# EAGLE board Domuino_ (EAGLE 6.6.0)
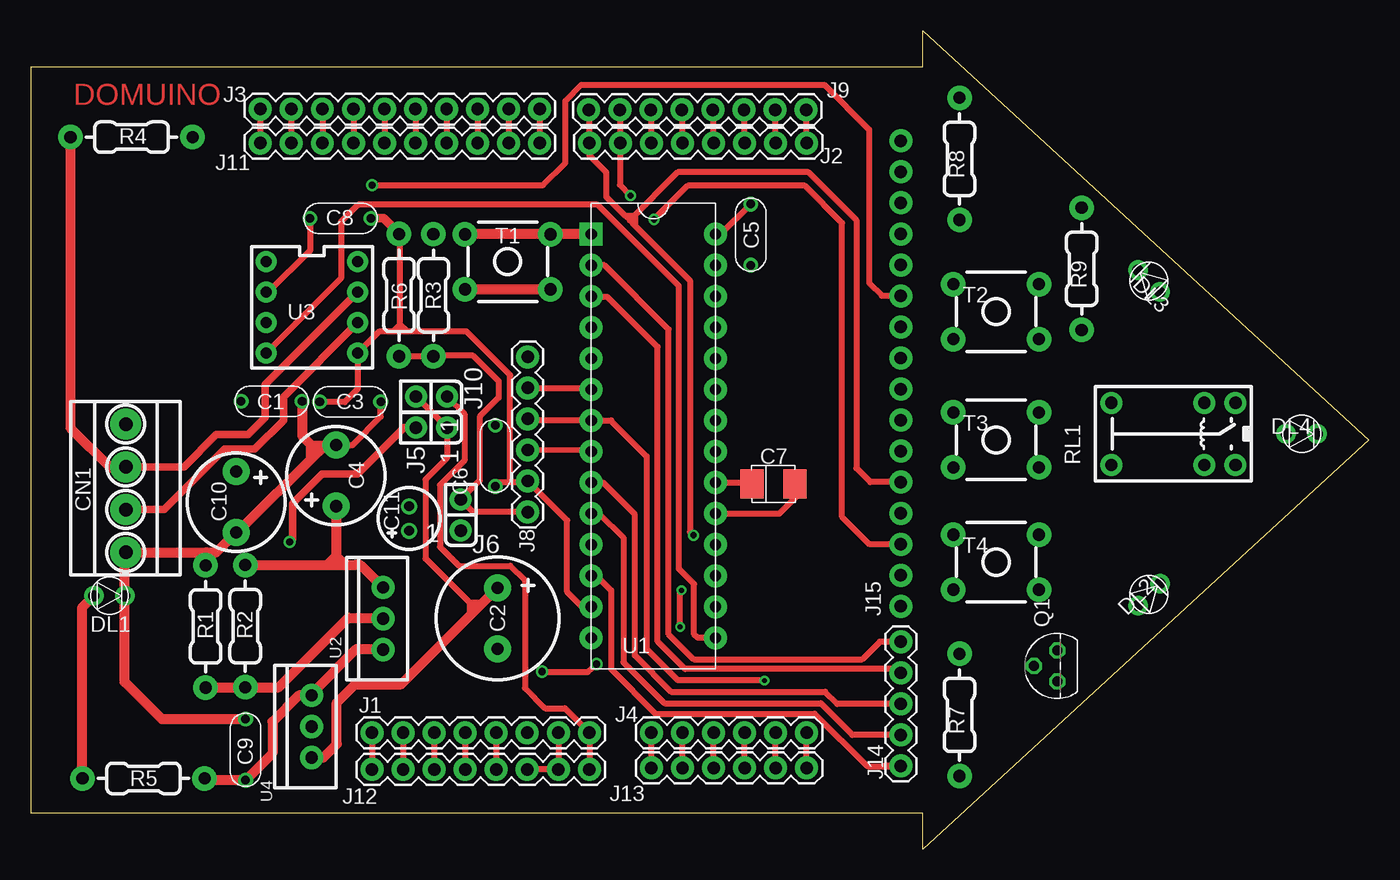
[diagram p0: board, top side]
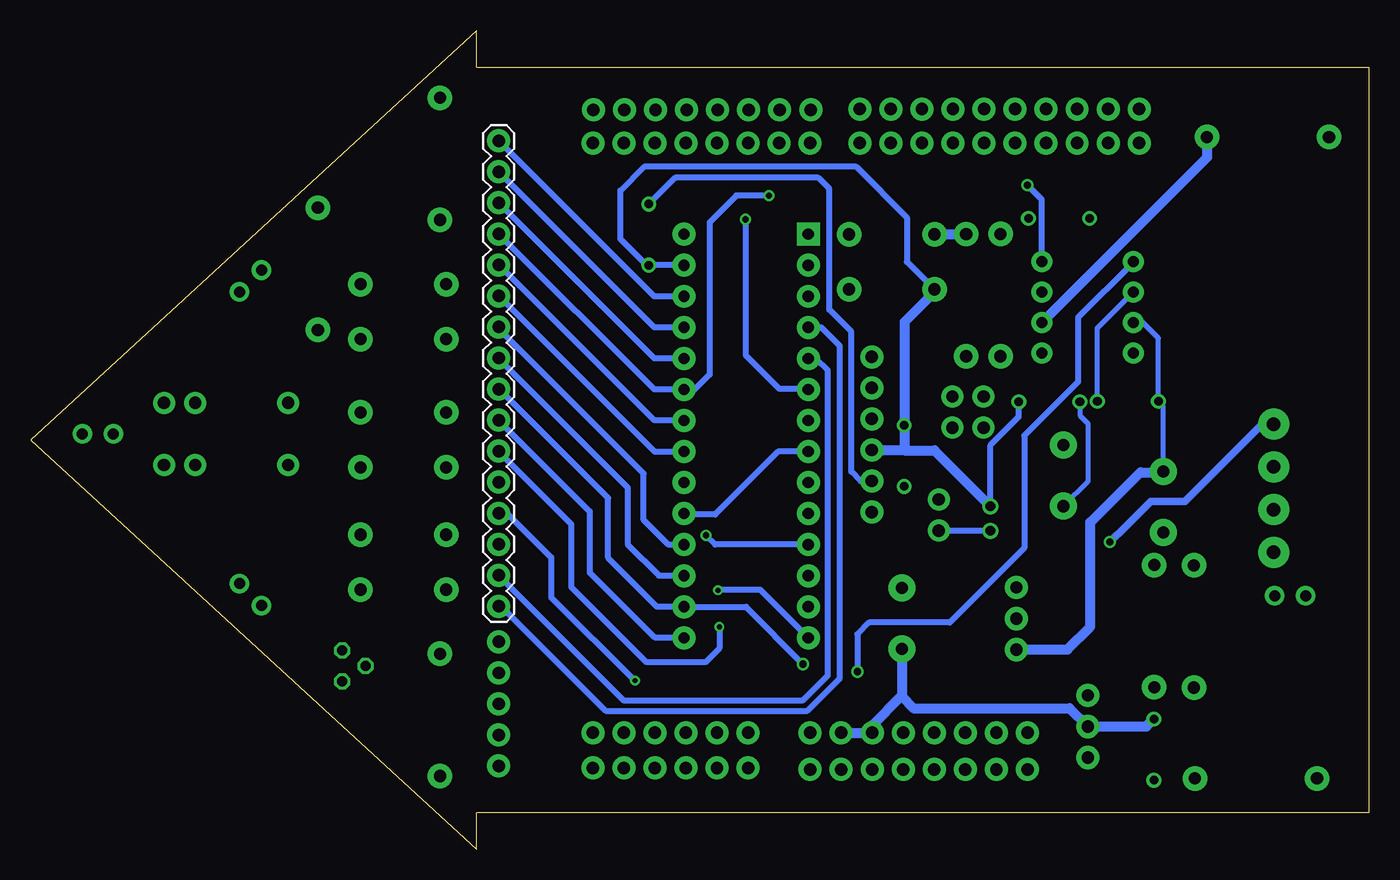
[diagram p1: board, bottom side, seen from below]

Size 109.5 x 67 mm. Coordinates in mm from the lower left corner, seen from the top.
Outline: 0,3 73,3 73,0 109.5,33.5 73,67 73,64 0,64 0,3
Copper layers (1*16): Top 0.035mm / dielectric 1.5mm / Bottom 0.035mm
Design rules "default *": minimum track width 10mil, minimum drill 24mil, track to track 8mil, track to pad 8mil, pad to pad 8mil, via to via 8mil, smd to smd 8mil, copper to edge 40mil, drill to drill 8mil, minimum pad ring 10mil, minimum via ring 8mil, stop-mask expansion 4mil, vias tented up to drill 0.6mm, thermal gap 10mil

## Footprints (pad centres in the part's own frame; a part is rotated, then mirrored left to right if it is on the bottom)
C_P5 = drill 0.7: P$1 -2.5,0; P$2 2.5,0
E_P5_D10 = drill 1 pad 2.2: P$1 -2.5,0; P$2 2.5,0
E_P5_D8 = drill 1 pad 2.2: P$1 -2.5,0; P$2 2.5,0
SIZEB = smd 1.9 x 2.4: P$2 1.75,0; P$3 -1.75,0
E_P2_D5 = drill 0.8 pad 1.3: P$1 -1,0; P$2 1,0
MORS_4V_P3.5 = drill 1.1 pad 2.54: P$1 0,5.25; P$2 0,1.75; P$3 0,-1.75; P$4 0,-5.25
DIODO_3MM_TRAD. = drill 0.9 pad 1.6: P$1 1.27,0; P$2 -1.27,0
1X08_ROUND = drill 1.016 pad 1.88: 1 -8.89,0; 2 -6.35,0; 3 -3.81,0; 4 -1.27,0; 5 1.27,0; 6 3.81,0; 7 6.35,0; 8 8.89,0
1X10 = drill 1.016 pad 1.88: 1 -11.43,0; 2 -8.89,0; 3 -6.35,0; 4 -3.81,0; 5 -1.27,0; 6 1.27,0; 7 3.81,0; 8 6.35,0; 9 8.89,0; 10 11.43,0
1X06 = drill 1.016 pad 1.88: 1 -6.35,0; 2 -3.81,0; 3 -1.27,0; 4 1.27,0; 5 3.81,0; 6 6.35,0
JUMPER(2V) = drill 1 pad 1.8: P$1 0,1.27; P$2 0,-1.27
1X05 = drill 1.016 pad 1.88: 1 -5.08,0; 2 -2.54,0; 3 0,0; 4 2.54,0; 5 5.08,0
1X16 = drill 1.016 pad 1.88: 1 -17.78,0; 2 -15.24,0; 3 -12.7,0; 4 -10.16,0; 5 -7.62,0; 6 -5.08,0; 7 -2.54,0; 8 0,0; 9 2.54,0; 10 5.08,0; 11 7.62,0; 12 10.16,0; 13 12.7,0; 14 15.24,0; 15 17.78,0; 16 20.32,0
TO92 = drill 0.813 octagon: 1 1.27,0; 2 0,1.905; 3 -1.27,0
R_TRAD_P10 = drill 1 pad 2: P$1 -5,0; P$2 5,0
SY-()-K = drill 1 pad 1.8: CO1 2.54,5.08; CO2 -2.54,5.08; NA -2.54,-5.08; NC 2.54,-5.08; P$1 -2.54,-2.54; P$2 2.54,-2.54
EVQ_PAG_07M = drill 1 pad 2: P$1 3.5,-2.25; P$2 3.5,2.25; P$3 -3.5,2.25; P$4 -3.5,-2.25
SPDIP-28PIN = drill 0.914 pad 1.88 square: P$1 -5.08,17.78 | drill 0.914 pad 1.88: P$2 -5.08,15.24; P$3 -5.08,12.7; P$4 -5.08,10.16; P$5 -5.08,7.62; P$6 -5.08,5.08; P$7 -5.08,2.54; P$8 -5.08,0; P$9 -5.08,-2.54; P$10 -5.08,-5.08; P$11 -5.08,-7.62; P$12 -5.08,-10.16; P$13 -5.08,-12.7; P$14 -5.08,-15.24; P$15 5.08,-15.24; P$16 5.08,-12.7; P$17 5.08,-10.16; P$18 5.08,-7.62; P$19 5.08,-5.08; P$20 5.08,-2.54; P$21 5.08,0; P$22 5.08,2.54; P$23 5.08,5.08; P$24 5.08,7.62; P$25 5.08,10.16; P$26 5.08,12.7; P$27 5.08,15.24; P$28 5.08,17.78
TO220 = drill 1 pad 1.9: P$1 -2.54,0; P$2 0,0; P$3 2.54,0
DIL08_P7.5 = drill 0.9 pad 1.7: P$1 -3.75,3.75; P$2 -3.75,1.25; P$3 -3.75,-1.25; P$4 -3.75,-3.75; P$5 3.75,-3.75; P$6 3.75,-1.25; P$7 3.75,1.25; P$8 3.75,3.75

## Placement (x,y rotation side)
C1  100n 50V  [C_P5]  19.72,36.66 0 top
C2  C_EL_P5X10  [E_P5_D10]  38.21,18.89 270 top
C3  C_TRAD_P5  [C_P5]  26.15,36.61 0 top
C4  C_EL_P5X8  [E_P5_D8]  24.99,30.58 90 top
C5  C_TRAD_P5  [C_P5]  58.92,50.3 270 top
C6  C_TRAD_P5  [C_P5]  38.02,32.2 90 top
C7  COND.TANTALIO_SIZE_B  [SIZEB]  60.78,29.9 180 top
C8  100n 50V  [C_P5]  25.36,51.63 180 top
C9  C_TRAD_P5  [C_P5]  17.59,8.15 90 top
C10  C_EL_P5X8  [E_P5_D8]  16.82,28.42 270 top
C11  C_EL_P2_D5  [E_P2_D5]  30.97,27.07 90 top
CN1  MORS_4VIE_P.3.5  [MORS_4V_P3.5]  7.8,29.55 0 top
DL1  LED_3MM_TRAD.  [DIODO_3MM_TRAD.]  6.45,20.75 0 top
DL2  LED_3MM_TRAD.  [DIODO_3MM_TRAD.]  91.5,20.85 45 top
DL3  LED_3MM_TRAD.  [DIODO_3MM_TRAD.]  91.5,46.5 135 top
DL4  LED_3MM_TRAD.  [DIODO_3MM_TRAD.]  104,34 0 top
J1  POWER - IN  [1X08_ROUND]  36.83,9.54 0 top
J2  DIGITAL_L - IN  [1X08_ROUND]  54.61,57.8 0 top
J3  DIGITAL_H - OUT  [1X10]  30.23,60.57 0 top
J4  ANALOG - IN  [1X06]  57.15,9.54 0 top
J5  JUMPER_2VIE_TRAD  [JUMPER(2V)]  32.8,34.5 270 top
J6  JUMPER_2VIE_TRAD  [JUMPER(2V)]  35.2,27.35 180 top
J8  PGM  [1X06]  40.68,33.95 90 top
J9  DIGITAL_L - OUT  [1X08_ROUND]  54.56,60.52 0 top
J10  JUMPER_2VIE_TRAD  [JUMPER(2V)]  32.8,37.05 270 top
J11  DIGITAL_H - IN  [1X10]  30.23,57.8 0 top
J12  POWER - OUT  [1X08_ROUND]  36.83,6.54 0 top
J13  ANALOG - OUT  [1X06]  57.15,6.66 0 top
J14  GPIO1  [1X05]  71.2,11.9 270 top
J15  GPIO2  [1X16]  71.2,37.66 90 bottom
Q1  BC337-25  [TO92]  84,15 90 top
R1  R_TRAD_P10  [R_TRAD_P10]  14.32,18.24 270 top
R2  R_TRAD_P10  [R_TRAD_P10]  17.56,18.26 90 top
R3  R_TRAD_P10  [R_TRAD_P10]  32.96,45.34 270 top
R4  R_TRAD_P10  [R_TRAD_P10]  8.26,58.28 0 top
R5  R_TRAD_P10  [R_TRAD_P10]  9.24,5.8 180 top
R6  R_TRAD_P10  [R_TRAD_P10]  30.15,45.35 90 top
R7  R_TRAD_P10  [R_TRAD_P10]  76,11 90 top
R8  R_TRAD_P10  [R_TRAD_P10]  76,56.5 90 top
R9  R_TRAD_P10  [R_TRAD_P10]  86,47.5 90 top
RL1  RELE'_1S_2C_SY-()K  [SY-()-K]  93.5,34 90 top
T1  PULSANTE_EVQ_PAG_07M  [EVQ_PAG_07M]  39.04,48.08 0 top
T2  PULSANTE_EVQ_PAG_07M  [EVQ_PAG_07M]  79,44 0 top
T3  PULSANTE_EVQ_PAG_07M  [EVQ_PAG_07M]  79,33.5 0 top
T4  PULSANTE_EVQ_PAG_07M  [EVQ_PAG_07M]  79,23.5 0 top
U1  [SPDIP-28PIN]  50.95,32.55 0 top
U2  LM317T_TO220  [TO220]  28.84,18.88 90 top
U3  MCP2562_DIL08  [DIL08_P7.5]  23.02,44.35 0 top
U4  [TO220]  22.99,10.05 90 top

## Library data of the parts
C1-C11 CN1 DL1-DL4 J5 J6 J10 R1-R9 RL1 T1-T4 U2-U4 = SEAV
J1 J12 = SparkFun-Connectors; PROD_ID: POWER
J2 J4 J8 J9 J13 = SparkFun-Connectors; PROD_ID: CONN-08437
J3 J11 = SparkFun-Connectors; PROD_ID: CONN-11563
J14 J15 = SparkFun-Connectors
Q1 = transistor-npn
U1 = Luca

## Nets
+3V3: C3.P$1 C4.P$1 C5.P$1 C6.P$1 C8.P$1 J8.2 R2.P$2 R6.P$2 U1.P$13 U1.P$28 U2.P$3 U3.P$5
+5V: C1.P$1 C9.P$1 C10.P$1 R5.P$1 U2.P$1 U3.P$3 U4.P$3
+12V: C2.P$1 J5.P$1 J10.P$2 U4.P$1
GND: C1.P$2 C2.P$2 C3.P$2 C4.P$2 C5.P$2 C6.P$2 C7.P$3 C8.P$2 C9.P$2 C10.P$2 C11.P$2 CN1.P$4 DL1.P$1 J1.6 J1.7 J8.3 J12.6 J12.7 R1.P$1 T1.P$1 T1.P$4 U1.P$8 U1.P$19 U1.P$27 U3.P$2 U4.P$2
N$1: J1.8 J10.P$1 J12.8
N$2: R1.P$2 R2.P$1 U2.P$2
N$3: J4.4 J13.4
N$4: C11.P$1 J6.P$1
N$5: J4.5 J13.5
N$6: J4.6 J13.6
N$7: R3.P$1 T1.P$2 T1.P$3 U1.P$1
N$8: J8.5 J15.3 U1.P$6
N$9: J8.4 J15.4 U1.P$7
N$10: CN1.P$2 R4.P$1 U3.P$7
N$11: CN1.P$3 R4.P$2 U3.P$6
N$12: J15.8 U1.P$16 U3.P$1
N$13: J15.7 U1.P$15 U3.P$4
N$14: J3.1 J11.1
N$15: J15.11 U1.P$21 U3.P$8
N$16: J6.P$2 J8.1 R3.P$2 R6.P$1
N$17: J3.2 J11.2
N$18: J3.3 J11.3
N$19: J3.4 J11.4
N$20: J3.5 J11.5
N$21: J3.6 J11.6
N$22: J3.7 J11.7
N$23: J3.8 J11.8
N$24: J3.9 J11.9
N$25: J3.10 J11.10
N$26: J2.1 J9.1 J15.5 U1.P$11
N$27: C7.P$2 U1.P$20
N$28: J15.14 U1.P$24
N$29: J2.3 J9.3
N$30: J2.4 J9.4
N$31: J2.5 J9.5
N$32: J2.6 J9.6
N$33: J2.7 J9.7
N$34: J2.8 J9.8
N$35: J1.1 J12.1
N$36: J1.2 J12.2
N$37: J1.3 J12.3
N$38: J1.4 J12.4
N$39: J1.5 J12.5
N$40: J4.1 J13.1
N$41: J4.2 J13.2
N$42: J4.3 J13.3
N$43: J14.5 U1.P$12
N$44: J14.4 U1.P$10
N$45: J14.3 U1.P$9
N$46: J14.2 U1.P$3
N$47: J14.1 U1.P$2
N$48: J15.1 U1.P$4
N$49: J15.2 U1.P$5
N$50: J15.6 U1.P$14
N$51: J15.12 U1.P$22
N$52: J15.9 U1.P$17
N$53: J15.10 U1.P$18
N$54: J2.2 J9.2 J15.13 U1.P$23
N$55: J15.15 U1.P$25
N$56: J15.16 U1.P$26
N$58: DL1.P$2 R5.P$2
V+: CN1.P$1 J5.P$2

## Tracks (layer width: path | path; a pad name or v marks a point on that pad's centre or on a via)
+3V3
  Top 0.4: 43.9,21.05 43.9,23.1
  Top 0.5: U1.P$28 56.45,50.33 C5.P$1 | U3.P$5 26.77,37.67 25.7,36.6 23.66,36.6 C3.P$1 | U1.P$13 45.1,19.85 43.9,21.05 43.9,26.92 J8.2 40.59,30.05 39.1,30.05 | U3.P$5 26.77,40.62 | 30.25,42.95 30.25,42.45 30.3,42.4 | 30.25,42.95 30.25,50.25 R6.P$2 | 30.3,42.4 28.57,42.4 U3.P$5 | 30.3,42.4 35.65,42.4 39.25,38.8 39.25,30.1 39.15,30.1 39.1,30.05 | C6.P$1 38.02,29.72 38.35,30.05 39.1,30.05 | 30.25,42.95 30.75,42.45 | 29.75,42.45 30.25,42.95
  Top 0.7: C8.P$1 28.87,51.63 R6.P$2
  Top 0.8: R2.P$2 25.05,23.26 | 25.05,23.26 26.51,23.26 | U2.P$3 27,23.26 26.51,23.26 | C4.P$1 24.99,23.32 25.05,23.26 | 26.51,23.26 26.5,23.25
  Bottom 0.4: C3.P$1 23.65,35.5 23,34.85 23,30.08 C4.P$1
  Bottom 0.5: J8.2 41.59,30.14 42.35,30.9 42.35,42.35 44.15,44.15 44.15,54.05 45.05,54.95 56.77,54.95 C5.P$1
+5V
  Top 0.8: R5.P$1 14.39,5.65 C9.P$1 19.8,7.86 19.8,10.45 21.94,12.59 U4.P$3 22.99,12.74 26.65,16.4 28.78,16.4 U2.P$1
  Bottom 0.4: C10.P$1 16.82,36.26 C1.P$1 17.22,41.82 18.5,43.1 U3.P$3
  Bottom 0.8: U2.P$1 24.66,16.34 22.8,18.2 22.8,26.75 18.7,30.85 16.89,30.85 C10.P$1
+12V
  Top 0.5: 35.9,20.2 32.3,23.8 32.3,30.25 34.07,32.02 J5.P$1 J10.P$2 | 35.9,20.2 36,20.1 | 36,20.1 36.46,19.64 | 35.9,20.2 35.9,19.3 | 36.85,20.2 35.95,20.2 36,20.15 36,20.1
  Top 0.8: U4.P$1 23.96,7.51 25.05,8.6 25.05,12 26.55,13.5 30.32,13.5 36.46,19.64 C2.P$1
GND
  Top 0.5: J8.3 45.69,32.73 U1.P$8 | U1.P$19 61.27,27.47 62.6,28.8 62.6,29.83 C7.P$3 | U3.P$2 19.45,45.6 22.9,49.05 22.9,51.59 C8.P$2 | C4.P$2 26.33,33.08 28.65,35.4 C3.P$2 | J1.7 J12.7 J12.6
  Top 0.8: 14.4,24.3 CN1.P$4 7.72,24.22 DL1.P$1 7.7,20.73 7.7,13.7 10.75,10.65 C9.P$2 | 14.4,24.3 15.2,24.3 C10.P$2 16.92,25.92 23.52,32.52 | R1.P$1 14.32,24.22 14.4,24.3 | 23.52,32.52 24.15,33.15 24.93,33.15 C4.P$2 | C1.P$2 22.22,33.83 23.52,32.52 | T1.P$4 T1.P$1
  Bottom 0.4: C1.P$2 22.22,42.65 U3.P$2
  Bottom 0.5: U1.P$8 48.35,32.55 53.5,27.4 55.96,27.4 U1.P$19 | C5.P$2 U1.P$27 59.09,47.79 61.25,49.95 61.25,53.9 59.3,55.85 41.95,55.85 37.8,51.7 37.8,48.09 T1.P$4 | 30.97,28.08 30.97,33.08 28.65,35.4 C3.P$2
  Bottom 0.8: C9.P$2 18.19,10.05 U4.P$2 24.49,11.55 37.25,11.55 38.21,12.51 C2.P$2 38.21,12.61 38.2,12.6 40.64,10.16 J1.6 J1.7 | T1.P$4 35.54,45.61 38,43.15 38,34.72 C6.P$2 38.02,32.67 | 38.02,32.67 38,32.65 35.55,32.65 C11.P$2 30.97,28.08 | J8.3 38.03,32.68 38.02,32.67
N$1
  Top 0.5: J10.P$1 34.07,37.03 35.5,35.6 35.5,31.8 33.5,29.8 33.5,24.75 35.05,23.2 39.25,23.2 40.45,22 40.45,13.2 42.1,11.55 43.71,11.55 J1.8 J12.8
N$2
  Top 0.8: R1.P$2 17.54,13.24 R2.P$1 20.31,13.26 26,18.95 28.77,18.95 U2.P$2
N$3
  Top 0.5: J13.4 J4.4
N$4
  Bottom 0.5: J6.P$1 C11.P$1
N$5
  Top 0.5: J13.5 J4.5
N$6
  Top 0.5: J13.6 J4.6
N$7
  Top 0.8: U1.P$1 T1.P$2 T1.P$3
  Bottom 0.8: T1.P$3 33.27,50.33 R3.P$1
N$8  (via drill 0.5)
  Top 0.5: J8.5 45.74,37.76 U1.P$6 | J15.3 68.64,24.96 66.4,27.2 66.4,51.25 63.35,54.3 53.75,54.3 v51,51.55
  Bottom 0.5: v51,51.55 51,40.45 48.25,37.7 45.94,37.7 U1.P$6
N$9  (via drill 0.4)
  Top 0.5: J8.4 40.81,35.09 U1.P$7 47.51,35.09 47.51,35.04 50.4,32.15 50.4,16.4 52.95,13.85 60,13.85 v60.05,13.8
  Bottom 0.5: v60.05,13.8 66.9,20.6 66.9,23.9 70.5,27.5 J15.4
N$10
  Top 0.6: CN1.P$2 12.55,31.3 15.2,33.95 17.8,33.95 19.2,35.35 19.2,38.03 U3.P$7
  Top 0.8: R4.P$1 3.26,34.49 6.5,31.25 7.75,31.25 CN1.P$2
N$11
  Top 0.6: CN1.P$3 10.95,27.8 15.9,32.75 18.35,32.75 20.7,35.1 20.7,37.03 U3.P$6
  Bottom 0.8: R4.P$2 13.26,56.61 U3.P$6
N$12  (via drill 0.6)
  Top 0.5: v46.3,15.15 45.6,14.5 42,14.5 41.95,14.55 v41.85,14.55
  Bottom 0.5: U3.P$1 19.27,48.03 23.8,43.5 23.8,38.25 28.2,33.85 28.2,24.65 34.3,18.55 40.9,18.55 41.85,17.6 v41.85,14.55 | v46.3,15.15 50.95,19.85 U1.P$16 58.25,19.85 62.25,23.85 62.25,28.75 71.16,37.66 J15.8
N$13
  Top 0.5: U1.P$15 54.59,17.31 54.3,17.6 54.3,21.7 53.05,22.95 53.05,46.1 46.4,52.75 26.8,52.75 25.4,51.35 25.4,46.73 U3.P$4
  Bottom 0.5: U1.P$15 arc-90 56.07,17.35 58.45,17.35 63.75,22.65 63.75,27.65 71.2,35.1 J15.7 70.82,35.12
N$14
  Top 0.5: J3.1 J11.1
N$15  (via drill 0.6)
  Top 0.5: v27.95,54.35 41.95,54.35 43.75,56.15 43.75,61.25 45.05,62.55 64.95,62.55 68.6,58.9 68.6,46.35 69.65,45.3 71.18,45.3 J15.11
  Bottom 0.5: 70.6,45.3 71.18,45.3 J15.11 71.18,45.28 58.45,32.55 U1.P$21 | U3.P$8 26.77,53.17 v27.95,54.35
N$16
  Top 0.5: R6.P$1 32.75,40.35 | 32.75,40.35 33.25,40.35 R3.P$2 | J8.1 36.22,27.6 J6.P$2 36.75,30.17 36.75,35.4 38.3,36.95 38.3,38.3 36.2,40.4 32.8,40.4 32.75,40.35
N$17
  Top 0.5: J3.2 J11.2
N$18
  Top 0.5: J3.3 J11.3
N$19
  Top 0.5: J3.4 J11.4
N$20
  Top 0.5: J3.5 J11.5
N$21
  Top 0.5: J3.6 J11.6
N$22
  Top 0.5: J3.7 J11.7
N$23
  Top 0.5: J3.8 J11.8
N$24
  Top 0.5: J3.9 J11.9
N$25
  Top 0.5: J3.10 J11.10
N$26  (via drill 0.5)
  Top 0.5: J9.1 45.7,60.49 45.7,57.25 | 45.7,57.25 45.7,56.8 47.1,55.4 47.1,53.4 48.65,51.85 | J2.1 45.72,57.27 45.7,57.25 | J15.5 68.71,30.04 67.55,31.2 67.55,51.5 63.65,55.4 52.95,55.4 49.02,51.48 | 48.65,51.85 49.02,51.48 | 49.02,51.48 49.45,51.05 | 49.45,51.05 53.95,46.55 53.95,26 v54.25,25.7 | 49.45,51.05 49.45,51.85 48.65,51.85
  Bottom 0.5: U1.P$11 53.48,24.93 v54.25,25.7
N$27
  Top 0.5: U1.P$20 58.92,30.01 C7.P$2
N$28
  Bottom 0.5: U1.P$24 58.47,40.17 J15.14
N$29
  Top 0.5: J9.3 50.75,57.85 J2.3
N$30
  Top 0.5: J9.4 53.29,57.85 J2.4
N$31
  Top 0.5: J9.5 55.83,57.85 J2.5
N$32
  Top 0.5: J9.6 58.37,57.85 J2.6
N$33
  Top 0.5: J9.7 60.91,57.85 J2.7
N$34
  Top 0.5: J9.8 63.45,57.85 J2.8
N$35
  Top 0.5: J1.1 J12.1
N$36
  Top 0.5: J1.2 J12.2
N$37
  Top 0.5: J1.3 J12.3
N$38
  Top 0.5: J1.4 J12.4
N$39
  Top 0.5: J1.5 J12.5
N$40
  Top 0.5: J13.1 J4.1
N$41
  Top 0.5: J13.2 J4.2
N$42
  Top 0.5: J13.3 J4.3
N$43
  Top 0.5: 69.83,6.82 J14.5 71.18,6.8 68.45,6.8 64.15,11.1 51.15,11.1 47.5,14.75 47.5,21.2 46.31,22.39 U1.P$12
N$44
  Top 0.5: J14.4 67.24,9.36 64.65,11.95 51.85,11.95 48.5,15.3 48.5,25.5 46.6,27.4 45.94,27.4 U1.P$10
N$45
  Top 0.5: J14.3 66,11.9 65,12.9 52.4,12.9 49.45,15.85 49.45,27.4 46.85,30 U1.P$9
N$46
  Top 0.5: U1.P$3 45.92,45.2 47.2,45.2 51.3,41.1 51.3,17 53.55,14.75 70.89,14.75 J14.2
N$47
  Top 0.5: J14.1 69.48,16.98 68.05,15.55 54.25,15.55 52.2,17.6 52.2,42.55 46.95,47.8 U1.P$2
N$48
  Bottom 0.5: U1.P$4 44.81,42.71 43.3,41.2 43.3,14 45.95,11.35 62.45,11.35 70.95,19.85 71.17,19.85 J15.1
N$49
  Bottom 0.5: U1.P$5 45.27,40.17 44.3,39.2 44.3,14.2 46.35,12.15 60.93,12.15 J15.2
N$50  (via drill 0.4)
  Top 0.5: v53.15,18.2 53.15,21.1 v53.25,21.2
  Bottom 0.5: U1.P$14 49.81,21.25 53.15,21.25 53.2,21.2 v53.25,21.2 | v53.15,18.2 53.15,16.45 54.3,15.3 59.1,15.3 65.25,21.45 65.25,26.6 71.2,32.55 J15.6 70.83,32.58
N$51
  Bottom 0.5: U1.P$22 58.19,35.09 58.2,35.1 58.45,35.1 71.17,47.82 J15.12 70.92,47.82
N$52
  Bottom 0.5: U1.P$17 58.1,22.4 60.65,24.95 60.65,29.6 71.2,40.15 J15.9
N$53
  Bottom 0.5: U1.P$18 56.05,24.95 57.35,24.95 59.35,26.95 59.35,30.75 71.2,42.6 J15.10
N$54  (via drill 0.5)
  Top 0.5: v49.1,53.5 48.21,54.39 J9.2 48.21,57.85 J2.2
  Bottom 0.5: J15.13 58.47,37.63 U1.P$23 56.01,37.65 55.15,37.65 53.95,38.85 53.95,51.3 51.75,53.5 v49.1,53.5
N$55
  Bottom 0.5: U1.P$25 58.47,42.71 J15.15
N$56
  Bottom 0.5: U1.P$26 58.47,45.25 J15.16
N$57
  Top 0.5: 25.8,23.4 25,24.2 24.3,23.5
N$58
  Top 0.8: R5.P$2 4.24,19.81 DL1.P$2
N$59
  Top 0.5: 24.1,33.2 22.8,33.2 22.8,32.1
V+  (via drill 0.6)
  Top 0.6: J5.P$2 30.55,34.5 26.75,30.7 23.85,30.7 21.45,28.3 21.45,25.4 v21.2,25.15
  Bottom 0.6: v21.2,25.15 19.9,26.4 17.85,28.45 15.05,28.45 8.75,34.75 7.85,34.75 CN1.P$1

## Text on the board
Top: DOMUINO